# Altium PCB ExtendBoard.PcbDoc
Units mm, origin at the board's own origin, x right, y up, seen from the top; angles counter-clockwise.
Board outline 31.39 x 33.49 mm, 2 copper layers (Top1, Bottom4), stack 1.071 mm thick; 3 components, 9 nets, 27 pads, 2 vias.
Unrouted connection lines stored in the file: 56.
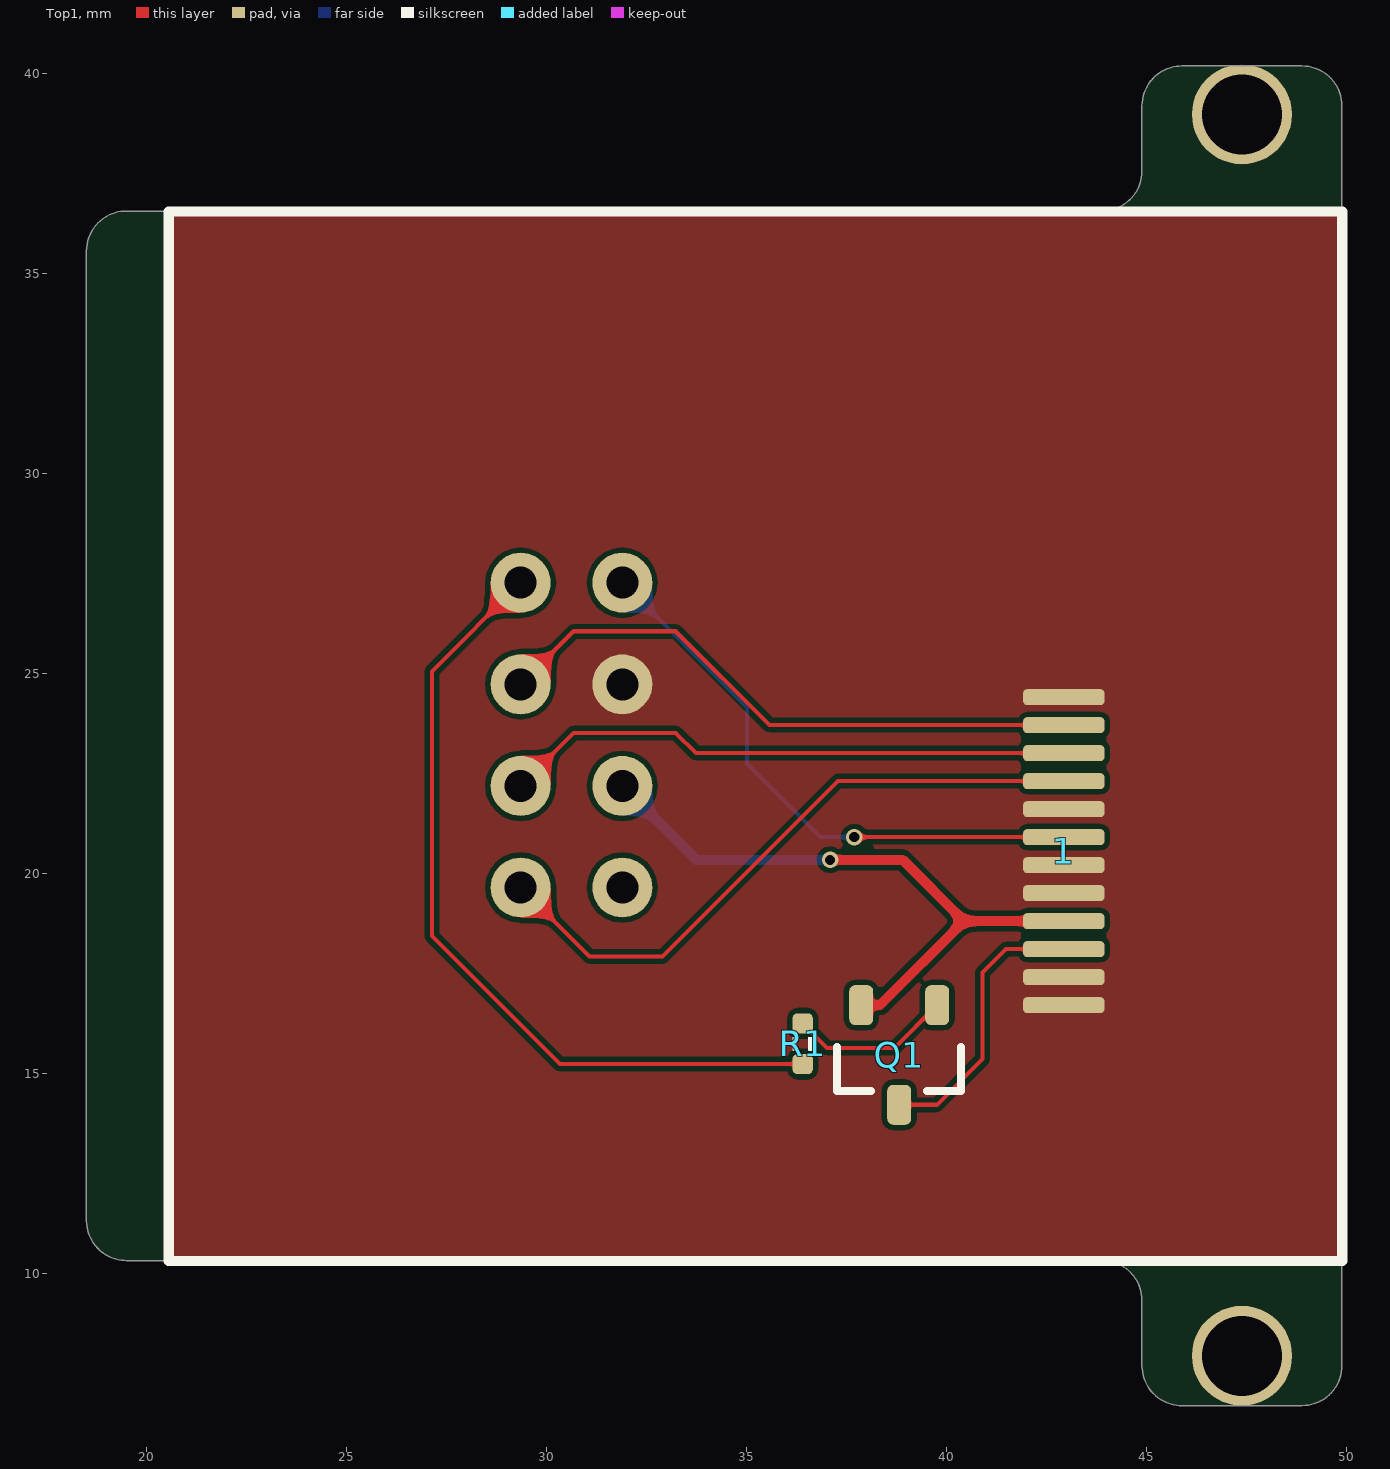
[diagram p0: Top1 view]
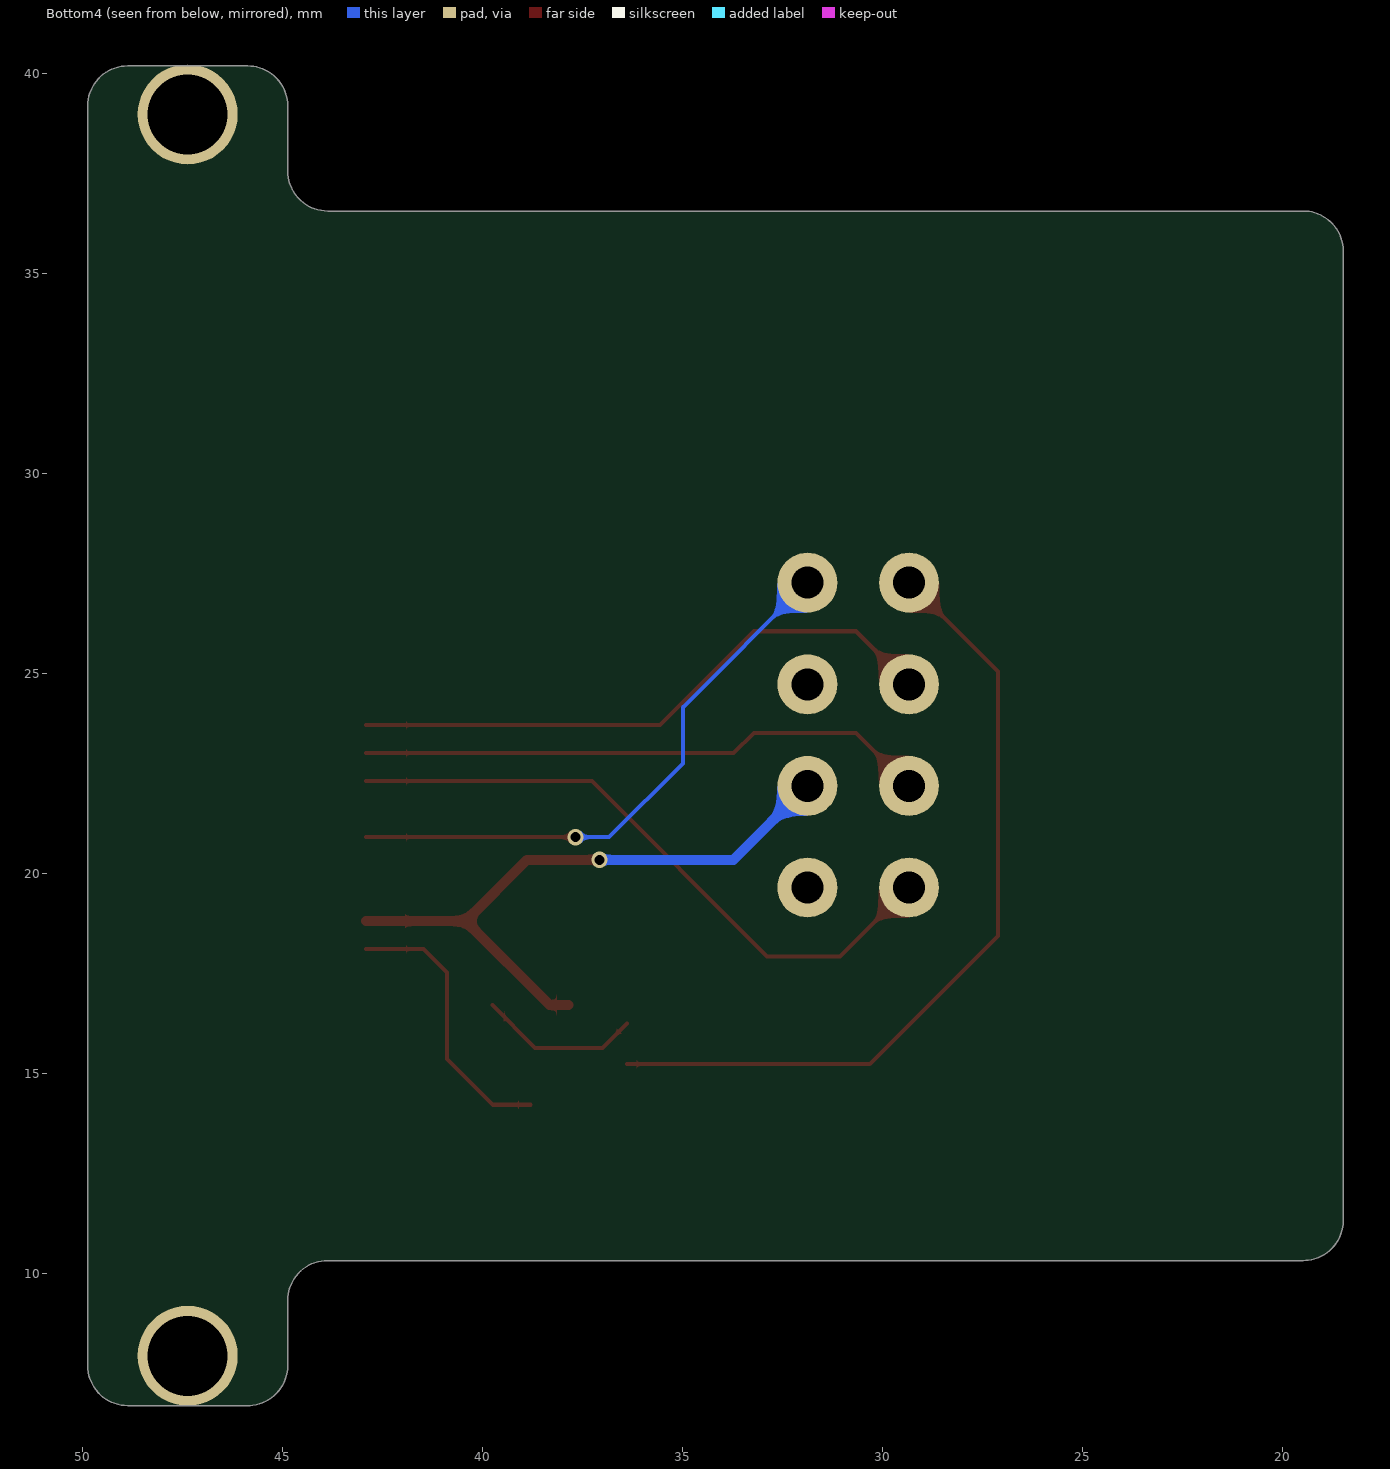
[diagram p1: Bottom4 view, seen from below]

## Layer stack, top to bottom
Top Solder: solder mask 0.0102, Solder Resist, Dk 3.5
Top1: signal copper 0.0356
Dielectric 2: core 1, PP-006, Dk 4.2
Bottom4: signal copper 0.0356
Bottom Solder: solder mask 0.0102, Solder Resist, Dk 3.5

## Board outline
20.491,10.328 43.879,10.328 cw(c43.879,9.328) 43.961,10.325 cw(c43.879,9.328) 44.879,9.328 44.879,7.702 ccw(c45.879,7.702) 45.751,6.71 ccw(c45.879,7.702) 45.879,6.702 48.879,6.702 ccw(c48.879,7.702) 49.879,7.702 49.879,39.194 ccw(c48.879,39.194) 48.879,40.194 45.879,40.194 ccw(c45.879,39.194) 45.59,40.151 ccw(c45.879,39.194) 44.879,39.194 44.879,37.567 cw(c43.879,37.567) 44.13,36.598 cw(c43.879,37.567) 43.879,36.567 19.491,36.567 ccw(c19.491,35.567) 19.135,36.501 ccw(c19.491,35.567) 18.491,35.567 18.491,11.328 ccw(c19.491,11.328) 19.372,10.336 ccw(c19.491,11.328) 19.491,10.328

## Design rules (kind name [scope] priority, off if disabled: settings)
Clearance [All] p1: gap=0.127 ignorepadtopadclearanceinfootprint=FALSE
ComponentClearance [All] p1: gap=0 collisioncheckmode=3 verticalgap=0 showdistances=FALSE
DiffPairsRouting [All] p1: maxlimit=0.229 minlimit=0.229 mostfreqgap=0.229 toplayer_minwidth=0.102 toplayer_maxwidth=0.102 toplayer_prefwidth=0.102 bottomlayer_minwidth=0.102 bottomlayer_maxwidth=0.102 bottomlayer_prefwidth=0.102 maxuncoupledlength=12.7
FanoutControl Fanout_BGA [All] p1: bgadir=Out bgaviamode=Centered fanoutstyle=Auto fanoutdirection=Alternating viagrid=0.025 // Fanout_BGA (Default Rule)
HoleSize [All] p1: absolutevalues=TRUE maxlimit=254 minlimit=0.203 maxpercent=80.000 minpercent=20.000
MinimumSolderMaskSliver [All] p1 off: minsoldermaskwidth=0.051
PlaneClearance [All] p1: clearance=0.203
PlaneConnect [All] p1: planeconnectstyle=Direct reliefexpansion=0.508 reliefentries=4 reliefconductorwidth=0.254 reliefairgap=0.254
PolygonConnect [All] p1: connectstyle=Direct reliefconductorwidth=0.254 reliefentries=4 polygonreliefangle="90 Angle" airgapwidth=0.254
RoutingVias [All] p1: holewidth=0.203 width=0.406 viastyle="Through Hole" minholewidth=0.152 minwidth=0.305 maxholewidth=0.711 maxwidth=1.27
SilkToBoardRegionClearance [All] p1 off:
SilkToSilkClearance [All] p1: silktosilkclearance=0
SilkToSolderMaskClearance [IsPad] p1: minsilkscreentomaskgap=0 clearancetoexposedcopper=TRUE
SolderMaskExpansion [All] p1: expansion=0.076 istentingtop=FALSE
Width [All] p1: maxlimit=254 minlimit=0.102 preferedwidth=0.102
20 further rules are at their usual default settings.

## Components (designator, comment, footprint, x,y, rotation, side; value= is the part's Value field where it differs from the comment)
1 "LCD-240x240" LCD-240X240-NOHOLE 37.668,23.876 r270 bottom locked
Q1 "AO3415A" SOT23-3 38.811,15.469 r270 top
R1 "1K" RES_0402 36.398,15.748 r90 top value=22R

## Footprints (in the part's own frame and the unit in brackets; to place one, negate y for a bottom-side part, rotate by r counter-clockwise, add the part's x,y. Pads: shape width x height; smd on the part's side, far side on the other; paste and mask are expansions set on the pad)
LCD-240X240-NOHOLE [mil]
  rrect50% 15.75x80 smd far side: 1(282,-207) 2(254.44,-207) 3(226.88,-207) 4(199.32,-207) 5(171.76,-207) 6(144.2,-207) 7(116.65,-207) 8(89.09,-207) 9(61.53,-207) 10(33.97,-207) 11(6.41,-207) 12(-21.15,-207)
  body extent -499,-565 534,673, height 20
RES_0402 [mil]
  rrect50% 20x20 smd: 1(-20,0) 2(20,0)
  silkscreen extent -7,-10 7,10, body extent -20,-10 20,10, height 14
SOT23-3 [mm] "SOT23, 3-Leads, Body 3.1x3.0mm (max), Pitch 0.95mm, IPC Medium Density"
  rrect50% 1x0.6 smd: 1(-1.246,0.95) 2(-1.246,-0.95) 3(1.246,0)
  silkscreen extent -0.2,-1.55 0.9,1.55, body extent -1.3,-1.45 1.5,1.45, height 1.2

## Part data
1: "显示屏"
Q1: "MOSFET", LatestRevisionDate=17-Jul-2002, LatestRevisionNote="Re-released for DXP Platform.", PackageDescription="TO, Flat Index; 3 In-Line, Axial Leads; Body Dia. 4.6mm; Lead Dia. 0.5 mm (max)", PackageReference=E3, PackageVersion=1995/1996, Published=8-Jun-2000, Publisher="Altium Limited"
R1: library part 电阻-0402, "Resistor"

## Free pads (board coordinates)
  round 1.5 hole 0.8: ""(29.347,19.654) ""(29.347,22.194) ""(29.347,24.734) ""(29.347,27.274) ""(31.887,19.654) ""(31.887,22.194) ""(31.887,24.734) ""(31.887,27.274)
  round 2.5 hole 2: ""(47.379,7.947) ""(47.379,38.981)

## Via types
v1: diameter 0.406, hole 0.254, Top1 to Bottom4, tented both sides, 2 vias

## Nets (pads, with @x,y where several pads share a name; then routed paths per layer and width w, separated by ;. In a path a pad name is that pad's centre, name@x,y a point inside that pad or via, vN(x,y) a via of type N, cw(c..) or ccw(c..) an arc to the next point about the centre after c; other vN are vias at no path point)
3V3: 1.4 pad.@31.887,22.194 Q1.2 | length 15.9
  Top1 w0.254: v1(37.084,20.345) 38.896,20.345 40.429,18.813 ; Q1.2 38.33,16.715 40.429,18.813 ; 1.4 40.429,18.813
  Bottom4 w0.254: pad.@31.887,22.194 33.736,20.345 v1(37.084,20.345)
DC: 1.7 pad.@31.887,27.274 | length 14.5
  Top1 w0.102: v1(37.685,20.913) 1.7
  Bottom4 w0.102: pad.@31.887,27.274 35.001,24.16 35.001,22.758 36.846,20.913 v1(37.685,20.913)
GND: 1.1 1.2 1.5 1.6 1.8 1.12 pad.@31.887,24.734
LCD_BL: pad.@29.347,27.274 R1.1 | length 20.3
  Top1 w0.102: pad.@29.347,27.274 27.127,25.054 27.127,18.44 30.328,15.24 R1.1
LCD_BL_VCC: 1.3 Q1.3 | length 7
  Top1 w0.102: Q1.3 39.75,14.223 40.894,15.367 40.894,17.526 41.481,18.113 1.3
MOSI: 1.10 pad.@29.347,22.194 | length 14.3
  Top1 w0.102: pad.@29.347,22.194 30.673,23.52 33.223,23.52 33.73,23.013 1.10
NetQ1_1: Q1.1 R1.2 | length 4.1
  Top1 w0.102: R1.2 37.008,15.646 38.693,15.646 Q1.1
RES: 1.11 pad.@29.347,24.734 | length 15.1
  Top1 w0.102: pad.@29.347,24.734 30.673,26.06 33.223,26.06 35.57,23.713 1.11
SCK: 1.9 pad.@29.347,19.654 | length 16.1
  Top1 w0.102: pad.@29.347,19.654 31.069,17.932 32.894,17.932 37.275,22.313 1.9

## Polygon pours and split planes (outlines as drawn)
GND on Top1 "GND_L01_P000" (solid, remove dead copper, pour order 0): 20.523,36.551 49.911,36.551 49.911,10.312 20.523,10.312

## Silkscreen, mask and mechanical layers (free items; w line width, h text height)
Mechanical 1:
  lines w0.254: 18.491,11.328 ccw(c19.491,11.328) 19.372,10.336 ccw(c19.491,11.328) 19.491,10.328 20.491,10.328 43.879,10.328 cw(c43.879,9.328) 43.961,10.325 cw(c43.879,9.328) 44.879,9.328 44.879,7.702 ccw(c45.879,7.702) 45.751,6.71 ccw(c45.879,7.702) 45.879,6.702 47.379,6.702 48.879,6.702 ccw(c48.879,7.702) 49.879,7.702 49.879,39.194 ccw(c48.879,39.194) 48.879,40.194 47.693,40.194 47.065,40.194 45.879,40.194 ccw(c45.879,39.194) 45.59,40.151 ccw(c45.879,39.194) 44.879,39.194 44.879,37.567 cw(c43.879,37.567) 44.13,36.598 cw(c43.879,37.567) 43.879,36.567 19.491,36.567 ccw(c19.491,35.567) 19.135,36.501 ccw(c19.491,35.567) 18.491,35.567 18.491,11.328
Drill Drawing:
  circle w0.254: c20.59,63.14 r0.847
  lines w0.254: 19.743,54.673 21.437,54.673 21.437,56.367 19.743,56.367 19.743,54.673 ; 19.743,60.177 21.437,60.177 20.59,58.483 19.743,60.177
  lines w0.381: 18.224,53.53 335.078,53.53 ; 18.224,64.96 335.078,64.96 ; 32.217,49.721 32.217,68.77 ; 45.675,49.721 45.675,68.77 ; 73.607,49.721 73.607,68.77 ; 86.456,49.721 86.456,68.77 ; 105.095,49.721 105.095,68.77 ; 135.312,49.721 135.312,68.77 ; 150.294,49.721 150.294,68.77 ; 169.238,49.721 169.238,68.77 ; 188.028,49.721 188.028,68.77 ; 209.714,49.721 209.714,68.77 ; 243.588,49.721 243.588,68.77 ; 277.461,49.721 277.461,68.77 ; 299.452,49.721 299.452,68.77 ; 18.224,49.721 335.078,49.721 335.078,68.77 18.224,68.77 18.224,49.721
  text "Symbol" at 20.511,66.103 h1.83
  text "Count" at 33.36,66.103 h1.83
  text "Hole Size" at 46.818,66.103 h1.83
  text "Plated" at 74.75,66.103 h1.83
  text "Hole Type" at 87.599,66.103 h1.83
  text "Drill Layer Pair" at 106.238,66.103 h1.83
  text "Via/Pad" at 136.455,66.103 h1.83
  text "Pad Shape" at 151.437,66.103 h1.83
  text "Template" at 170.381,66.103 h1.83
  text "Description" at 189.171,66.103 h1.83
  text "Hole Tolerance (+)" at 210.857,66.103 h1.83
  text "Hole Tolerance (-)" at 244.731,66.103 h1.83
  text "Hole Length" at 278.604,66.103 h1.83
  text "Routed Path Length" at 300.595,66.103 h1.83
  text "2" at 33.36,62.293 h1.52
  text "10.00mil (0.254mm)" at 46.818,62.293 h1.52
  text "PTH" at 74.75,62.293 h1.52
  text "Round" at 87.599,62.293 h1.52
  text "Top1 - Bottom4" at 106.238,62.293 h1.52
  text "Via" at 136.455,62.293 h1.52
  text "Rounded" at 151.437,62.293 h1.52
  text "v41h25m0mx0" at 170.381,62.293 h1.52
  text "-" at 278.604,62.293 h1.52
  text "-" at 300.595,62.293 h1.52
  text "2" at 33.36,58.483 h1.52
  text "78.74mil (2.000mm)" at 46.818,58.483 h1.52
  text "PTH" at 74.75,58.483 h1.52
  text "Round" at 87.599,58.483 h1.52
  text "Top1 - Bottom4" at 106.238,58.483 h1.52
  text "Pad" at 136.455,58.483 h1.52
  text "Rounded" at 151.437,58.483 h1.52
  text "c250h200" at 170.381,58.483 h1.52
  text "-" at 278.604,58.483 h1.52
  text "-" at 300.595,58.483 h1.52
  text "8" at 33.36,54.673 h1.52
  text "31.50mil (0.800mm)" at 46.818,54.673 h1.52
  text "PTH" at 74.75,54.673 h1.52
  text "Round" at 87.599,54.673 h1.52
  text "Top1 - Bottom4" at 106.238,54.673 h1.52
  text "Pad" at 136.455,54.673 h1.52
  text "Rounded" at 151.437,54.673 h1.52
  text "c150h80" at 170.381,54.673 h1.52
  text "-" at 278.604,54.673 h1.52
  text "-" at 300.595,54.673 h1.52
  text "12 Total" at 33.36,50.863 h1.52